# Altium PCB Mostek.PcbDoc
Units mil, origin at the board's own origin, x right, y up, seen from the top; angles counter-clockwise.
Board outline 1610 x 1040 mil, 2 copper layers (Top Layer, Bottom Layer); 16 components, 14 nets, 38 pads, 2 vias.
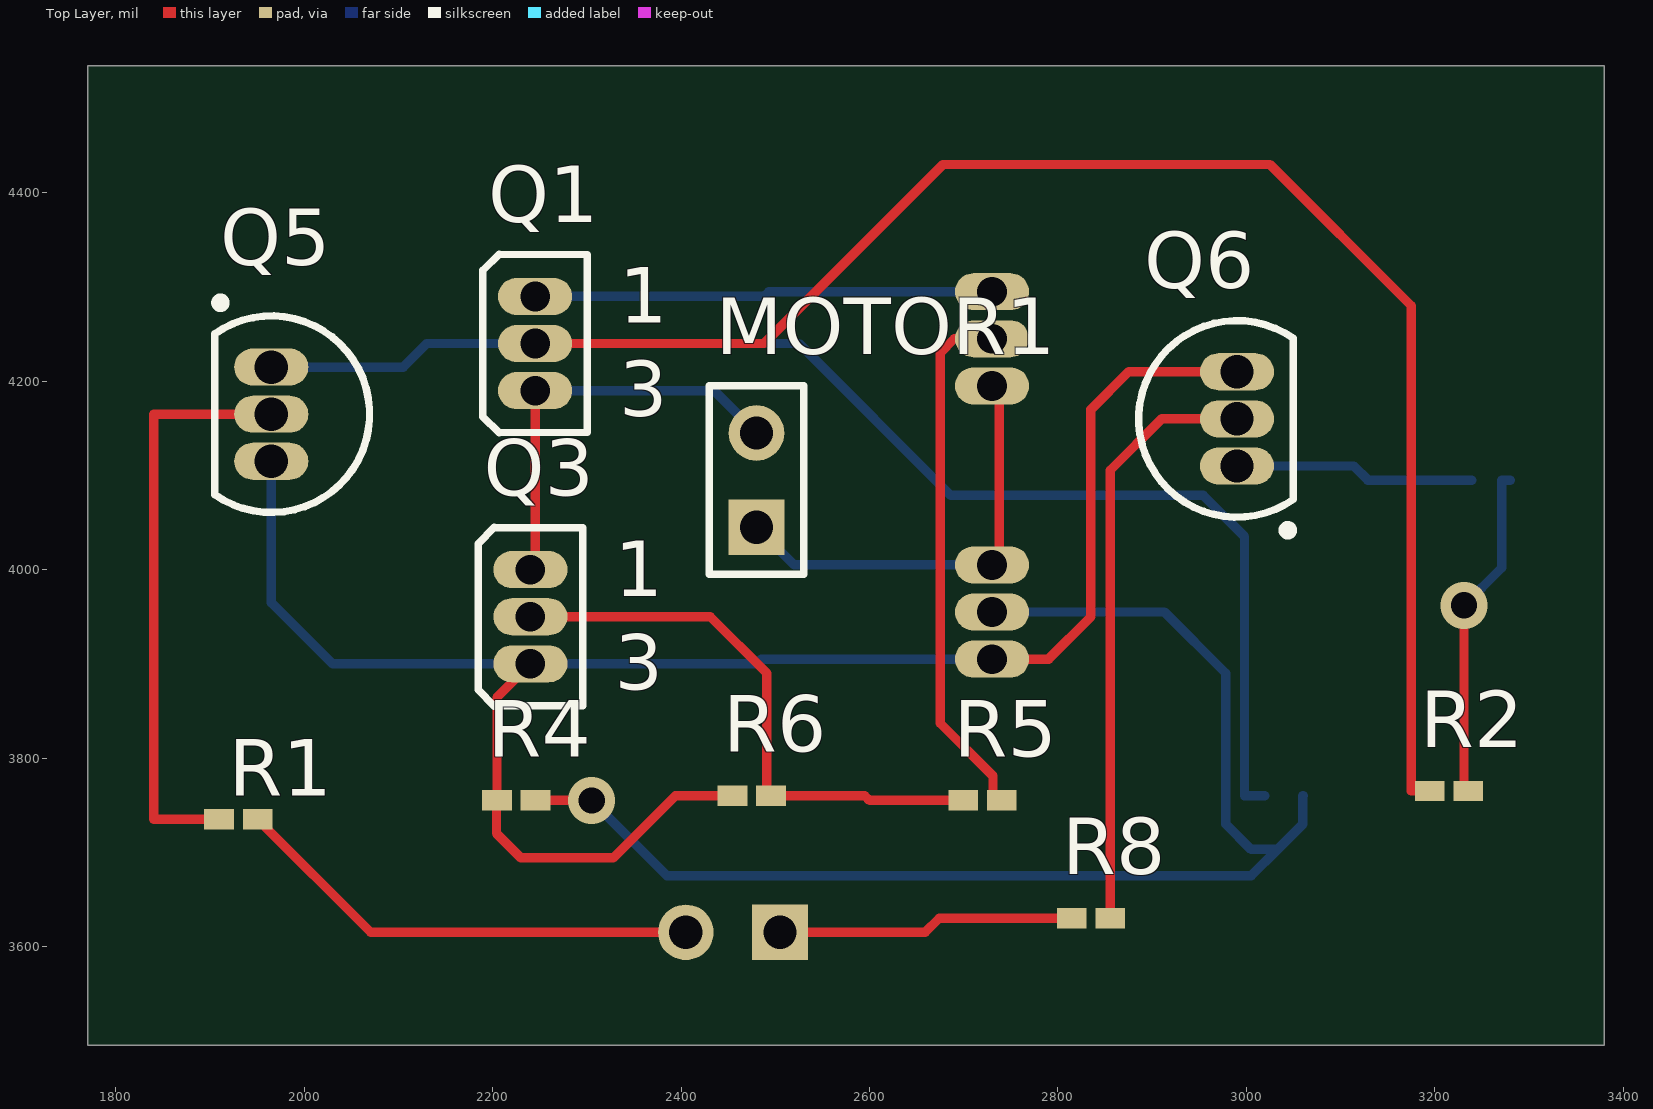
[diagram p0: Top Layer view]
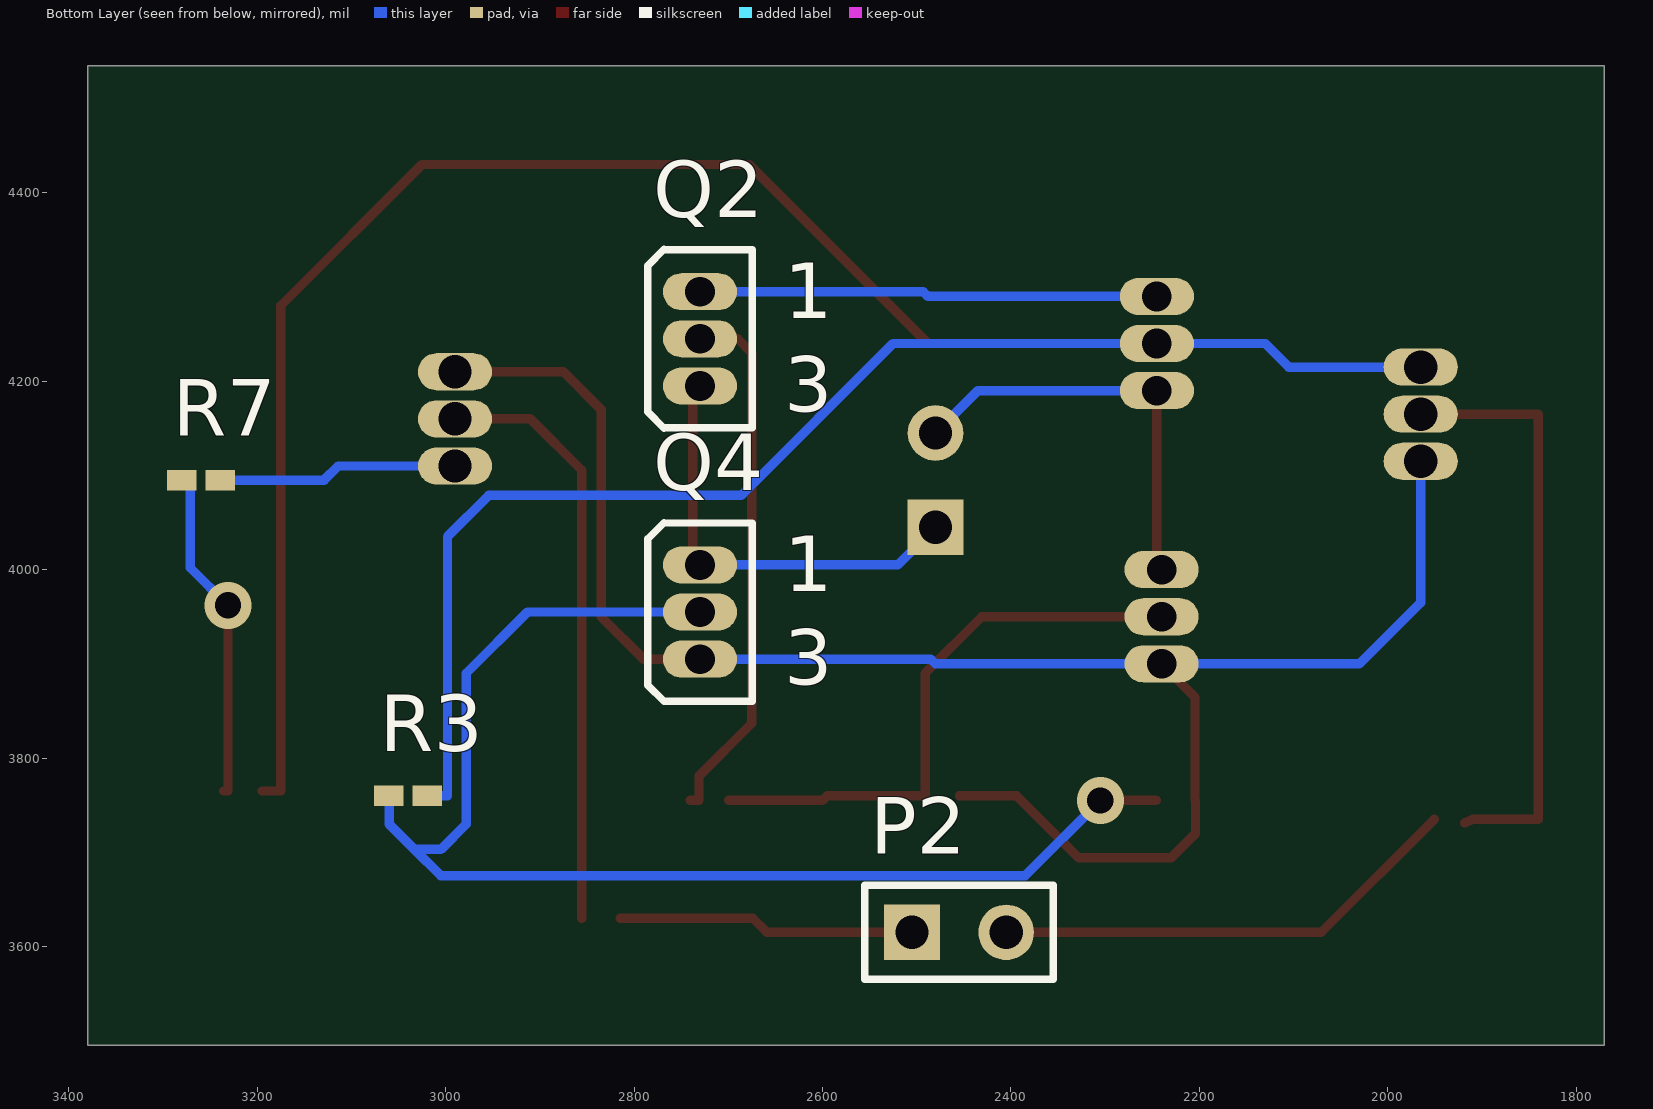
[diagram p1: Bottom Layer view, seen from below]

## Layer stack, top to bottom
Top Solder: solder mask 0.4, Solder Resist, Dk 3.5
Top Layer: signal copper 1.4
Dielectric 1: dielectric 12.6, FR-4, Dk 4.8
Bottom Layer: signal copper 1.4
Bottom Solder: solder mask 0.4, Solder Resist, Dk 3.5

## Board outline
1770,3495 3380,3495 3380,4535 1770,4535

## Design rules (kind name [scope] priority, off if disabled: settings)
Clearance [All] p1: gap=10
PolygonConnect [All] p1: connectstyle=Relief reliefconductorwidth=10 reliefentries=4 polygonreliefangle="90 Angle" airgapwidth=10
RoutingVias [All] p1: holewidth=28 width=50 viastyle="Through Hole" minholewidth=28 minwidth=50 maxholewidth=28 maxwidth=50
SolderMaskExpansion [All] p1: expansion=4
UnpouredPolygon [All] p1: allowunpoured=FALSE
Width [All] p1: maxlimit=10 minlimit=10 preferedwidth=10
29 further rules are at their usual default settings.

## Components (designator, comment, footprint, x,y, rotation, side; value= is the part's Value field where it differs from the comment)
MOTOR1 "Motor" HDR1X2 2480,4045 r90 top
P2 "HDR1X2" HDR1X2 2505,3615 r180 bottom
Q1 "MOSFET-N" E3 2245,4240 r0 top
Q2 "MOSFET-N" E3 2730,4245 r180 bottom
Q3 "MOSFET-N" E3 2240,3950 r0 top
Q4 "MOSFET-N" E3 2730,3955 r180 bottom
Q5 "NPN" TO-226-AA 1965,4165 r180 top
Q6 "NPN" TO-226-AA 2990,4160 r0 top
R1 "180k" RESC0402 1930,3735 r0 top
R2 "100k" RESC0402 3215,3765 r0 top
R3 "10k" RESC0402 3040,3760 r180 bottom
R4 "10k" RESC0402 2225,3755 r0 top
R5 "10k" RESC0402 2720,3755 r0 top
R6 "10k" RESC0402 2475,3760 r0 top
R7 "100k" RESC0402 3259.75,4095 r0 bottom
R8 "100k" RESC0402 2835,3630 r0 top

## Footprints (in the part's own frame and the unit in brackets; to place one, negate y for a bottom-side part, rotate by r counter-clockwise, add the part's x,y. Pads: shape width x height; smd on the part's side, far side on the other; paste and mask are expansions set on the pad)
E3 [mm] "TO, Flat Index; 3 In-Line, Axial Leads; Body Dia. 4.6mm; Lead Dia. 0.5 mm (max)"
  oval 2x1 hole 0.8: 1(0,1.27) 2(0,0) 3(0,-1.27)
  silkscreen extent -1.41,-2.41 1.41,2.41
HDR1X2 [mm] "Connector; Header; 2 Position"
  rect 1.5x1.5 hole 0.9: 1(0,0)
  round 1.5 hole 0.9: 2(2.54,0)
  silkscreen extent -1.27,-1.27 3.81,1.27, body extent -1.27,-1.24 3.81,1.3, height 8.54
RESC0402 [mm]
  rect 0.8x0.55 smd: 1(-0.52,0) 2(0.52,0)
  body extent -0.57,-0.27 0.58,0.28, height 0.41
TO-226-AA [mm] "TO, Flat Index; 3 In-Line, Axial Leads; Body Dia. 4.8mm; Leads 0.55 x 0.51 mm (max)"
  oval 2x1 hole 0.9: 1(0,-1.27) 2(0,0) 3(0,1.27)
  silkscreen extent -2.65,-3.13 1.52,2.65, body extent -2.66,-2.66 1.52,2.66, height 5.33

## Part data
MOTOR1: "Motor, General Kind"
P2: "Header, 2-Pin"
Q1 Q2 Q3 Q4: "N-Channel MOSFET"
Q5 Q6: "NPN Bipolar Transistor"
R1 R2 R3 R4 R5 R6 R7 R8: library part RES, "Resistior"

## Via types
v1: diameter 50, hole 28, Top Layer to Bottom Layer, 2 vias

## Nets (pads, with @x,y where several pads share a name; then routed paths per layer and width w, separated by ;. In a path a pad name is that pad's centre, name@x,y a point inside that pad or via, vN(x,y) a via of type N, cw(c..) or ccw(c..) an arc to the next point about the centre after c; other vN are vias at no path point)
GND: 
NetMOTOR1_1: 
NetMOTOR1_2: 
NetP2_1: 
NetP2_2: 
NetQ1_2: 
NetQ2_2: 
NetQ3_2: 
NetQ4_2: 
NetQ5_2: 
NetQ6_1: 
NetQ6_2: 
VCC1: 
VCC2: 
pads on no net: MOTOR1.1 MOTOR1.2 P2.1 P2.2 Q1.1 Q1.2 Q1.3 Q2.1 Q2.2 Q2.3 Q3.1 Q3.2 Q3.3 Q4.1 Q4.2 Q4.3 Q5.1 Q5.2 Q5.3 Q6.1 Q6.2 Q6.3 R1.1 R1.2 R2.1 R2.2 R3.1 R3.2 R4.1 R4.2 R5.1 R5.2 R6.1 R6.2 R7.1 R7.2 R8.1 R8.2
copper on no net: | length 11670.9
  Top Layer w10: 1918.52,3731.09 1909.53,3735 1840,3735 1840,4165 1965,4165 ; 1950.47,3735 2070.47,3615 2420,3615 ; 2240,3900 2204.53,3864.53 2204.53,3755 2204,3755 2204,3720 2230,3694 2328,3694 2394,3760 2454.53,3760 ; 2240,3950 2431,3950 2491,3890 2491,3760 2495.47,3760 2595,3760 2600,3755 2699.53,3755 ; 2240,4000 2245,4000 2245,4190 ; 2245,4240 2488,4240 2678,4430 3025,4430 3175,4280 3175,3765 3194.53,3765 ; 2245.47,3755 v1(2305,3755) ; 2520,3615 2659,3615 2674,3630 2814.53,3630 ; 2730,3905 2790,3905 2835,3950 2835,4170 2875,4210 2990,4210 ; 2730,4005 2737.71,4005 2737.71,4195 2730,4195 ; 2730,4245 2690,4245 2675,4230 2675,3837 2731,3781 2731,3755 2740.47,3755 ; 2855.47,3630 2855.47,4105.47 2910,4160 2990,4160 ; v1(3231,3962) 3231,3765 3235.47,3765
  Bottom Layer w10: 1965,4115 1965,3965 2030,3900 2240,3900 2480,3900 2485,3905 2730,3905 ; 1965,4215 2105,4215 2130,4240 2245,4240 2525,4240 2686,4079 2954,4079 2998,4035 2998,3760 3019.53,3760 ; 2245,4190 2435,4190 2480,4145 ; 2245,4290 2488,4290 2493,4295 2730,4295 ; v1(2305,3755) 2385,3675 3005,3675 3033,3703 ; 2480,4045 2520,4005 2730,4005 ; 2730,3955 2913,3955 2978,3890 2978,3730 3005,3703 3033,3703 ; 2990,4110 3114,4110 3129,4095 3239.28,4095 ; 3060.47,3760 3060,3760 3060,3730 3033,3703 ; v1(3231,3962) 3271,4002 3271,4095 3280.22,4095

## Silkscreen, mask and mechanical layers (free items; w line width, h text height)
Mechanical 1:
  the board outline again, w47.24

## Text inside footprints (layer, text, board x,y; h text height)
Q1: Top Overlay "1" at 2334.57,4261.85 h59.05; Top Overlay "3" at 2334.57,4162.72 h59.05
Q2: Bottom Overlay "1" at 2640.43,4266.85 h59.05; Bottom Overlay "3" at 2640.43,4167.72 h59.05
Q3: Top Overlay "1" at 2329.57,3971.85 h59.05; Top Overlay "3" at 2329.57,3872.72 h59.05
Q4: Bottom Overlay "1" at 2640.43,3976.85 h59.05; Bottom Overlay "3" at 2640.43,3877.72 h59.05